# EAGLE board Mini mp3 (EAGLE 9.6.2)
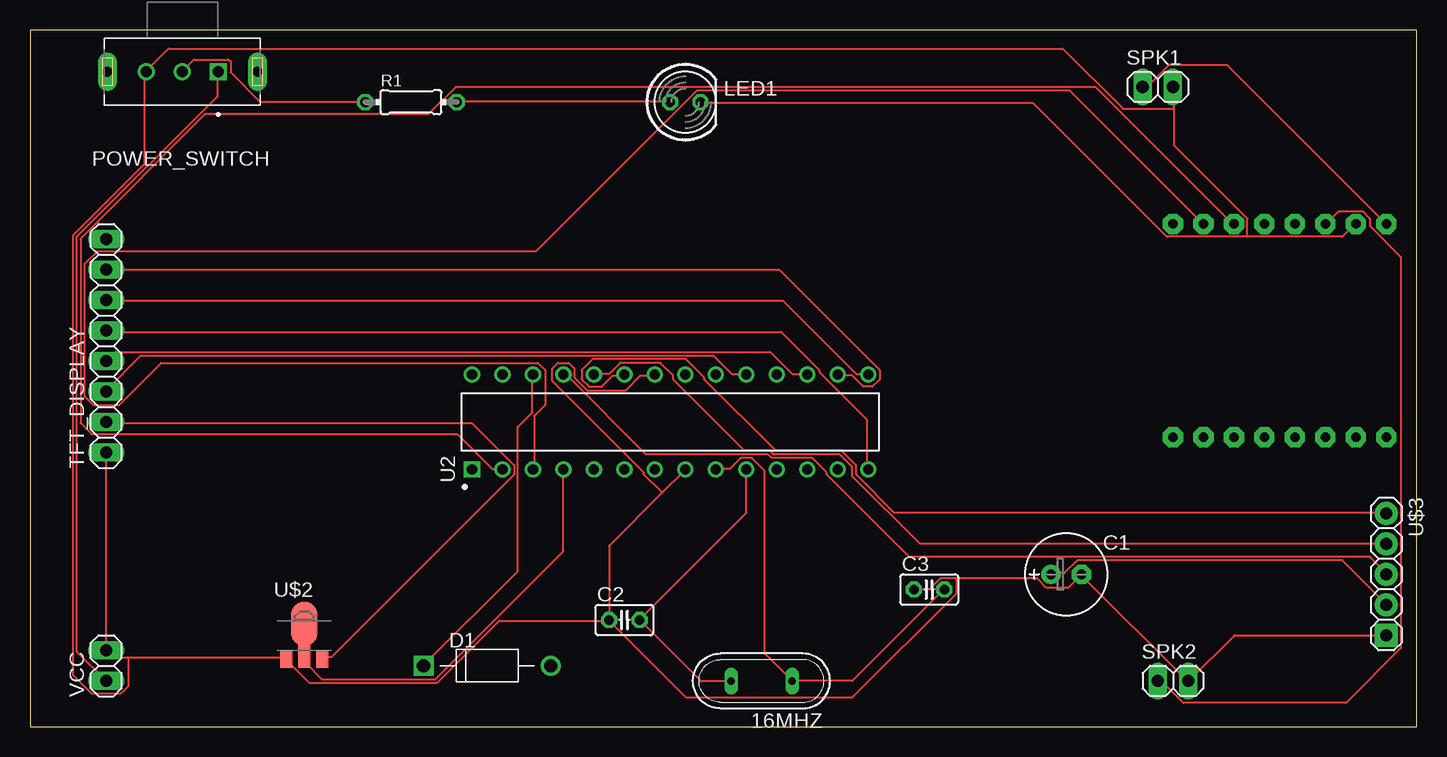
[diagram p0: board, top side]
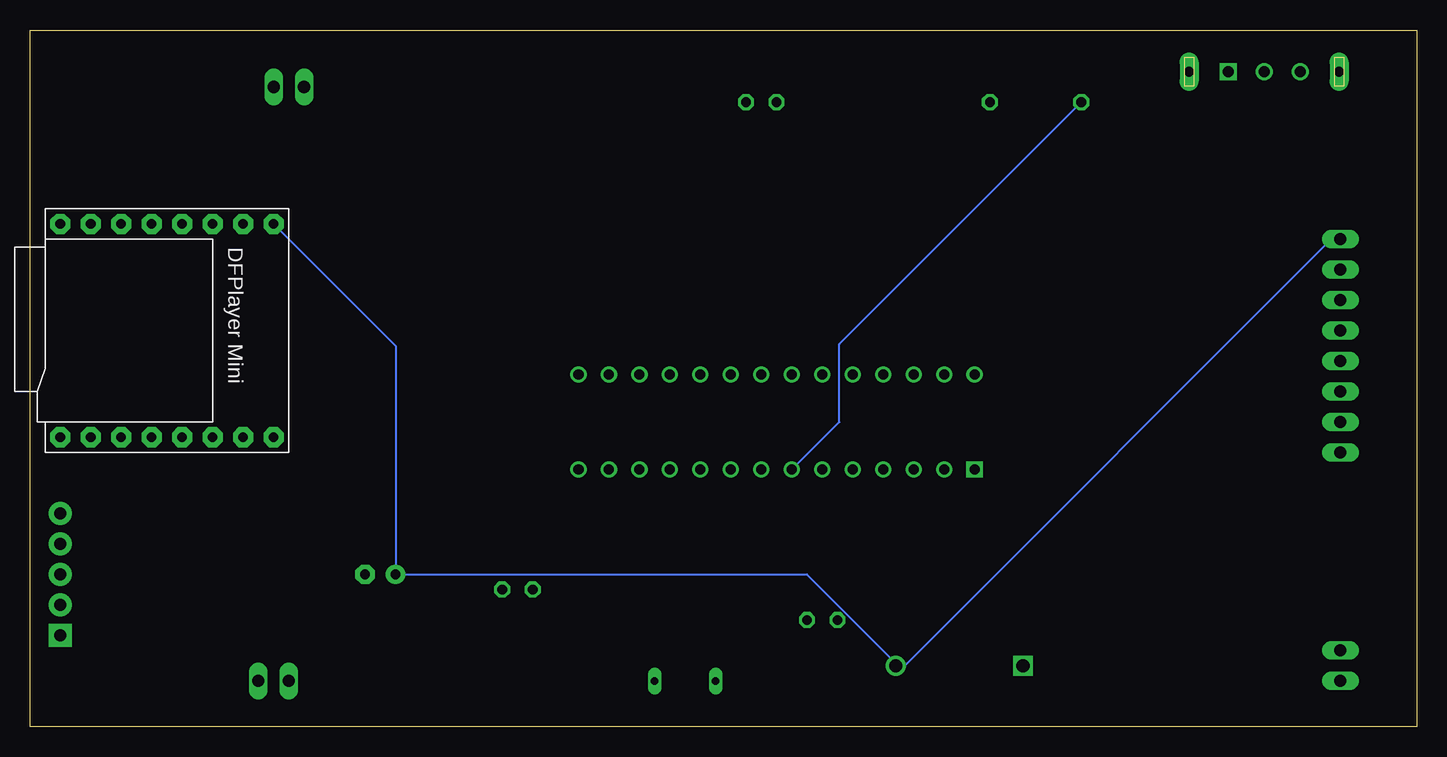
[diagram p1: board, bottom side, seen from below]

Size 115.55 x 58.09 mm. Coordinates in mm from the lower left corner, seen from the top.
Outline: 0,58.09 0,0 115.55,0 115.55,58.09 0,58.09
Copper layers (1*16): Top 0.035mm / dielectric 1.5mm / Bottom 0.035mm
Design rules "default": minimum track width 6mil, minimum drill 0.35mm, track to track 6mil, track to pad 6mil, pad to pad 6mil, via to via 6mil, smd to smd 6mil, copper to edge 40mil, drill to drill 6mil, minimum pad ring 10mil, minimum via ring 8mil, stop-mask expansion 4mil, vias tented up to drill 0mil, thermal gap 10mil

## Footprints (pad centres in the part's own frame; a part is rotated, then mirrored left to right if it is on the bottom)
QS = drill 0.61 long: 1 -2.54,0; 2 2.54,0
E2,5-7 = drill 0.813 pad 1.6: + -1.27,0 | drill 0.813 pad 1.6 octagon: - 1.27,0
C025-025X050 = drill 0.813 octagon: 1 -1.27,0; 2 1.27,0
DIOAD1060W80L520D270 = drill 1.1 pad 1.65: A 5.3,0 | drill 1.1 pad 1.65 square: C -5.3,0
LED5MM = drill 0.813 octagon: A -1.27,0; K 1.27,0
SW_EG1206 = drill 0.9 square: 1 -3,0 | drill 0.9: 2 0,0; 3 3,0 | drill 0.8 pad 1.6 long: SH1 -6.25,0; SH2 6.25,0
0204/7 = drill 0.813 octagon: 1 -3.81,0; 2 3.81,0
1X02 = drill 1.016 long: 1 -1.27,0; 2 1.27,0
1X08 = drill 1.016 long: 1 -8.89,0; 2 -6.35,0; 3 -3.81,0; 4 -1.27,0; 5 1.27,0; 6 3.81,0; 7 6.35,0; 8 8.89,0
DIP794W46P254L2967H457Q28B = drill 0.85 square: 1 -3.96,16.51 | drill 0.85: 2 -3.96,13.97; 3 -3.96,11.43; 4 -3.96,8.89; 5 -3.96,6.35; 6 -3.96,3.81; 7 -3.96,1.27; 8 -3.96,-1.27; 9 -3.96,-3.81; 10 -3.96,-6.35; 11 -3.96,-8.89; 12 -3.96,-11.43; 13 -3.96,-13.97; 14 -3.96,-16.51; 15 3.96,-16.51; 16 3.96,-13.97; 17 3.96,-11.43; 18 3.96,-8.89; 19 3.96,-6.35; 20 3.96,-3.81; 21 3.96,-1.27; 22 3.96,1.27; 23 3.96,3.81; 24 3.96,6.35; 25 3.96,8.89; 26 3.96,11.43; 27 3.96,13.97; 28 3.96,16.51
DFPLAYER = drill 0.8 pad 1.676 octagon: ADKEY1 8.89,-1.27; ADKEY2 8.89,1.27; BUSY 8.89,8.89; DAC_L -8.89,-1.27; DAC_R -8.89,1.27; GND_1 -8.89,-6.35; GND_2 8.89,-6.35; IO1 8.89,-8.89; IO2 8.89,-3.81; RX -8.89,6.35; SPK1 -8.89,-3.81; SPK2 -8.89,-8.89; TX -8.89,3.81; USB+ 8.89,3.81; USB- 8.89,6.35; VCC -8.89,8.89
SOT89 = smd 1 x 1.5: 1 -1.499,-1.981; 3 1.499,-1.981 | smd 1 x 2: 2 0,-1.727 | smd 2.2 x 3.7: 2@1 0,0.94
KY-040-PORT = drill 1.016 pad 1.93: CLK -6.35,0; DT -3.81,0; SW -1.27,0; VCC 1.27,0 | drill 1.016 pad 1.93 square: GND 3.81,0

## Placement (x,y rotation side)
16MHZ  [QS]  60.96,3.81 180 top
C1  100μF  [E2,5-7]  86.36,12.7 0 top
C2  20pF  [C025-025X050]  49.53,8.89 0 top
C3  20pF  [C025-025X050]  74.93,11.43 0 top
D1  1N4007  [DIOAD1060W80L520D270]  38.1,5.08 0 top
LED1  [LED5MM]  54.61,52.07 0 top
POWER_SWITCH  EG1206  [SW_EG1206]  12.7,54.61 180 top
R1  450Ω  [0204/7]  31.75,52.07 0 top
SPK1  [1X02]  93.98,53.34 0 top
SPK2  [1X02]  95.25,3.81 0 top
TFT_DISPLAY  [1X08]  6.35,31.75 90 top
U2  ATMEGA328P-PU  [DIP794W46P254L2967H457Q28B]  53.34,25.4 90 top
U$1  DFPLAYER  [DFPLAYER]  104.14,33.02 270 bottom
U$2  HT7533-1_  [SOT89]  22.86,7.62 0 top
U$3  KY-040  [KY-040-PORT]  113.03,11.43 270 top
VCC  9v  [1X02]  6.35,5.08 90 top

## Library data of the parts
16MHZ = special; SPICEPREFIX: B
C1-C3 = rcl; SPICEPREFIX: C
D1 = 1N4007; AVAILABILITY: In Stock; CHECK_PRICES: https://www.snapeda.com/parts/1N4007/Diotec/view-part/?ref=eda; DESCRIPTION: Diode Standard 1000 V 1A Through Hole DO-41/DO-204AC; MF: Diotec Semiconductor; MP: 1N4007; PACKAGE: DO-41-2 Diotec; PRICE: None; SNAPEDA_LINK: https://www.snapeda.com/parts/1N4007/Diotec/view-part/?ref=snap
LED1 = led
POWER_SWITCH = EG1206; AVAILABILITY: In Stock; CHECK_PRICES: https://www.snapeda.com/parts/EG1206/E-Switch/view-part/?ref=eda; DESCRIPTION: SWITCH SLIDE SPDT 200MA 30V; MF: E-Switch; MP: EG1206; PACKAGE: None; PRICE: None; PURCHASE-URL: https://www.snapeda.com/api/url_track_click_mouser/?unipart_id=394778&manufacturer=E-Switch&part_name=EG1206&search_term=switch; SNAPEDA_LINK: https://www.snapeda.com/parts/EG1206/E-Switch/view-part/?ref=snap
R1 = rcl; SPICEPREFIX: R
SPK1 SPK2 TFT_DISPLAY VCC = pinhead
U2 = ATMEGA328P-PU; AVAILABILITY: In Stock; CHECK_PRICES: https://www.snapeda.com/parts/ATMEGA328P-PU/Microchip/view-part/?ref=eda; DESCRIPTION: AVR AVR® ATmega Microcontroller IC 8-Bit 20MHz 32KB (16K x 16) FLASH 28-PDIP; MF: Microchip; MP: ATMEGA328P-PU; PACKAGE: PDIP-28 Atmel; PRICE: None; PURCHASE-URL: https://www.snapeda.com/api/url_track_click_mouser/?unipart_id=44282&manufacturer=Microchip&part_name=ATMEGA328P-PU&search_term=atmega328p-pu; SNAPEDA_LINK: https://www.snapeda.com/parts/ATMEGA328P-PU/Microchip/view-part/?ref=snap
U$1 = DFPlayer_v1
U$2 = HT7533-1; AVAILABILITY: Not in stock; CHECK_PRICES: https://www.snapeda.com/parts/HT7533-1/Holtek/view-part/?ref=eda; DESCRIPTION: Smd c.Int. Ht-7533-1 (Sot-89)Tape&Reel h Oltek.; MF: Holtek; MP: HT7533-1; PACKAGE: SOT-89 Holtek; PRICE: None; SNAPEDA_LINK: https://www.snapeda.com/parts/HT7533-1/Holtek/view-part/?ref=snap
U$3 = KY-040; AVAILABILITY: Not in stock; CHECK_PRICES: https://www.snapeda.com/parts/KY-040/Joy-IT/view-part/?ref=eda; DESCRIPTION: KY-5.0-4P Green(RAL6018/T) ; CONTACT WITH TIN PLATED MARK; MF: Joy-IT; MP: KY-040; PACKAGE: Package; PRICE: None; SNAPEDA_LINK: https://www.snapeda.com/parts/KY-040/Joy-IT/view-part/?ref=snap

## Nets
0: C1.- C2.1 C3.1 LED1.K POWER_SWITCH.3 SPK1.2 SPK2.2 TFT_DISPLAY.1 U2.8 U2.22 U$1.GND_1 U$2.1 U$3.GND VCC.2
5.5V: C1.+ D1.A TFT_DISPLAY.8 U$1.VCC U$3.VCC
AVCC: U2.20
N$1: U2.3 U$1.RX
N$2: U2.2 U$1.TX
N$3: U2.23 U$3.CLK
N$4: SPK1.1 U$1.SPK2
N$5: TFT_DISPLAY.2 U$2.3
N$6: U2.4 U$2.2 U$2.2@1
N$7: TFT_DISPLAY.3 U2.19
N$8: TFT_DISPLAY.4 U2.17
N$9: TFT_DISPLAY.5 U2.14
N$10: TFT_DISPLAY.7 U2.16
N$11: TFT_DISPLAY.6 U2.15
N$12: POWER_SWITCH.2 R1.1 U2.7
N$13: POWER_SWITCH.1 VCC.1
N$14: U2.24 U$3.DT
N$15: D1.C U2.26
N$16: U2.25 U$3.SW
N$17: 16MHZ.2 C2.2 U2.10
N$18: 16MHZ.1 C3.2 U2.9
N$19: LED1.A R1.2
S: SPK2.1 U$1.SPK1

## Tracks (layer width: path | path; a pad name or v marks a point on that pad's centre or on a via)
0
  Top 0.152: 101.45,40.84 109.37,40.84 110.44,41.91 U$1.GND_1 | 101.45,40.84 94.74,40.84 83.62,51.97 55.88,51.97 LED1.K | 95.35,51.51 95.35,48.46 101.45,42.37 101.45,40.84 | 95.35,51.51 95.35,53.34 SPK1.2 | C3.1 74.93,11.43 75.84,12.34 77.22,12.34 | 77.22,12.34 83.92,12.34 84.68,11.58 86.51,11.58 87.58,12.65 | 87.58,12.65 96.42,3.81 SPK2.2 96.57,3.81 100.38,7.62 U$3.GND | 87.58,12.65 C1.- | 52.68,19.51 54.51,21.34 U2.8 | 52.68,19.51 48.26,15.09 C2.1 48.26,8.84 | 52.68,19.51 51.16,21.03 51.16,21.18 43.54,28.8 43.54,29.87 43.99,30.33 44.91,30.33 45.36,29.87 45.36,29.11 46.43,28.04 49.63,28.04 50.85,29.26 52.07,29.26 U2.22 | 8.18,5.79 6.81,5.79 6.35,6.25 VCC.2 TFT_DISPLAY.1 | 8.18,5.79 21.29,5.79 U$2.1 21.29,5.64 23.27,3.66 33.93,3.66 39.12,8.84 48.26,8.84 | 8.18,5.79 8.18,3.35 7.57,2.74 5.13,2.74 3.61,4.27 3.61,41 9.55,46.94 9.55,54.56 POWER_SWITCH.3 9.7,54.71 11.53,56.54 86.05,56.54 91.08,51.51 95.35,51.51 | 77.22,12.34 77.22,11.12 68.53,2.44 54.66,2.44 48.26,8.84
5.5V
  Top 0.152: C1.+ 85.14,12.8 86.21,12.8 87.27,13.87 109.37,13.87 113.03,10.21 U$3.VCC
  Bottom 0.152: U$1.VCC 85.09,31.75 C1.+ 50.81,12.7 43.4,5.29 D1.A 42.67,5.08 7.11,40.64 TFT_DISPLAY.8
N$1
  Top 0.152: U$1.RX 86.66,53.03 55.57,53.03 42.16,39.62 5.59,39.62 4.52,38.56 4.52,27.58 5.28,26.82 7.42,26.82 10.92,30.33 42.32,30.33 42.93,29.72 42.93,26.82 42.01,25.91 42.01,21.49 U2.3
N$2
  Top 0.152: U2.2 39.27,21.49 38.51,21.49 35.61,24.38 5.13,24.38 4.22,25.3 4.22,40.69 14.58,51.05 33.17,51.05 35.46,53.34 88.8,53.34 100.23,41.91 U$1.TX
N$3
  Top 0.152: U2.23 49.48,29.26 48.56,29.26 47.65,28.35 46.58,28.35 45.97,28.96 45.97,29.72 46.89,30.63 54.66,30.63 56.18,29.11 56.18,28.96 62.13,23.01 67.61,23.01 68.83,21.79 68.83,21.03 72.03,17.83 113.03,17.83 U$3.CLK
N$4
  Top 0.152: SPK1.1 93.07,53.34 94.89,55.17 99.77,55.17 U$1.SPK2
N$5
  Top 0.152: U$2.3 24.49,5.79 25.09,5.79 40.33,21.03 40.33,21.79 36.83,25.3 6.35,25.3 TFT_DISPLAY.2
N$6
  Top 0.152: U$2.2@1 22.96,8.53 22.96,5.94 U$2.2 22.96,5.79 22.96,5.33 24.33,3.96 33.78,3.96 44.45,14.63 U2.4
N$7
  Top 0.152: U2.19 59.69,29.41 58.47,29.41 56.95,30.94 9.25,30.94 6.35,28.04 TFT_DISPLAY.3
N$8
  Top 0.152: TFT_DISPLAY.4 7.11,31.24 61.67,31.24 63.5,29.41 64.72,29.41 U2.17
N$9
  Top 0.152: U2.14 69.75,21.49 69.75,25.6 65.79,29.57 65.79,29.72 62.59,32.92 6.35,32.92 TFT_DISPLAY.5
N$10
  Top 0.152: TFT_DISPLAY.7 62.43,38.1 70.81,29.72 70.81,28.96 70.21,28.35 69.44,28.35 68.53,29.26 67.31,29.26 U2.16
N$11
  Top 0.152: U2.15 69.75,29.41 68.83,29.41 62.74,35.51 6.35,35.51 TFT_DISPLAY.6
N$12
  Top 0.152: R1.1 27.84,52.12 19.15,52.12 16.71,54.56 16.71,55.47 16.56,55.63 13.66,55.63 12.75,54.71 POWER_SWITCH.2
  Bottom 0.152: U2.7 48.11,25.4 48.11,31.9 R1.1
N$13
  Top 0.152: VCC.1 3.91,6.25 3.91,40.84 15.65,52.58 15.65,54.56 POWER_SWITCH.1
N$14
  Top 0.152: U$3.DT 74.17,15.24 68.53,20.88 68.53,21.64 67.46,22.71 61.98,22.71 61.67,23.01 59.54,23.01 53.59,28.96 53.59,29.26 52.53,30.33 49.17,30.33 48.26,29.41 47.04,29.41 U2.24
N$15
  Top 0.152: U2.26 41.86,29.26 41.86,26.21 40.64,24.99 40.64,12.95 32.87,5.18 D1.C
N$16
  Top 0.152: U2.25 44.45,29.26 44.75,29.26 51.31,22.71 61.52,22.71 61.82,22.4 65.18,22.4 66.4,21.18 66.4,21.03 73.25,14.17 111.66,14.17 113.03,12.8 U$3.SW
N$17
  Top 0.152: 16MHZ.2 55.88,3.81 C2.2 50.85,8.99 59.69,17.83 U2.10
N$18
  Top 0.152: C3.2 76.15,11.43 68.53,3.81 16MHZ.1 61.21,6.1 61.21,21.34 60.15,22.4 59.23,22.4 58.32,21.49 57.25,21.49 U2.9
N$19
  Top 0.152: R1.2 35.61,52.12 53.29,52.12 LED1.A
S
  Top 0.152: SPK2.1 94.28,3.81 96.11,1.98 109.68,1.98 114.25,6.55 114.25,39.17 111.66,41.76 111.66,42.37 111.05,42.98 109.07,42.98 108,41.91 U$1.SPK1